# Altium PCB PCB1.PcbDoc (part 1 of 2)
Units mm, origin at the board's own origin, x right, y up, seen from the top; angles counter-clockwise.
Board outline 62.36 x 41.38 mm, 2 copper layers (Top Layer, Bottom Layer), stack 1.671 mm thick; 52 components, 47 nets, 174 pads, 61 vias.
Unrouted connection lines stored in the file: 1.
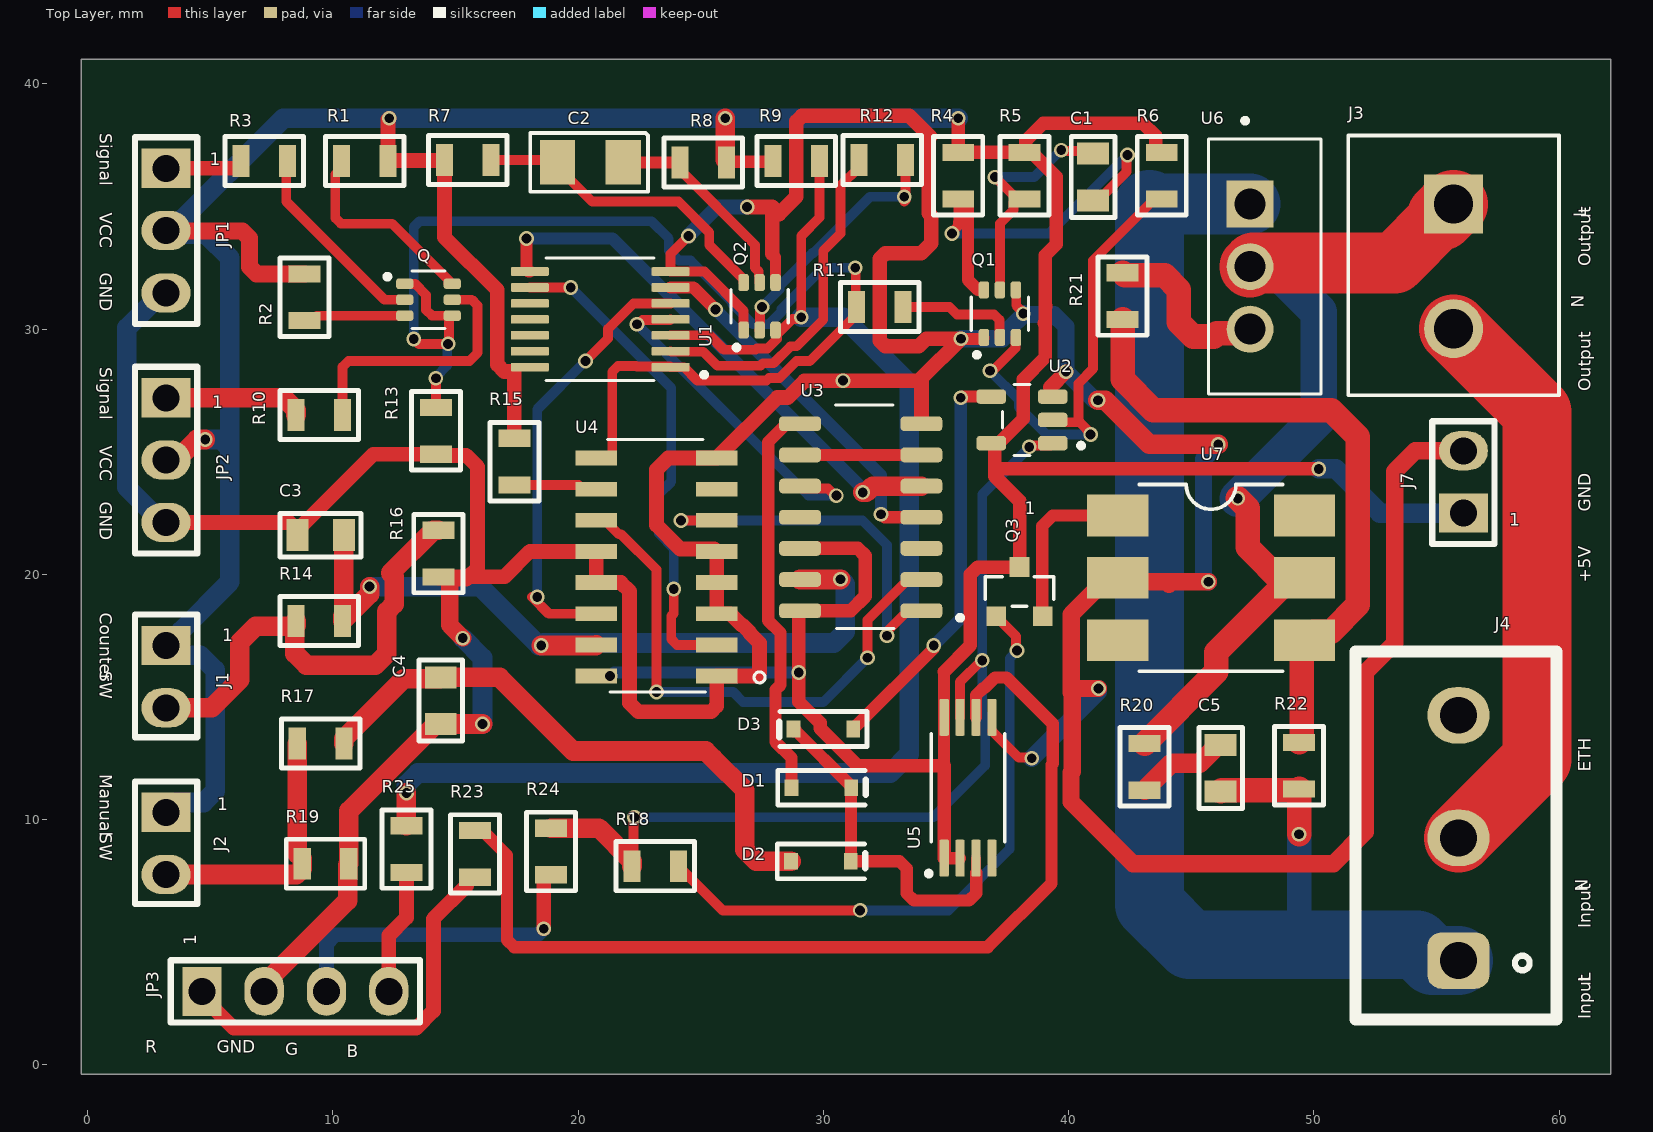
[diagram p0: Top Layer view]
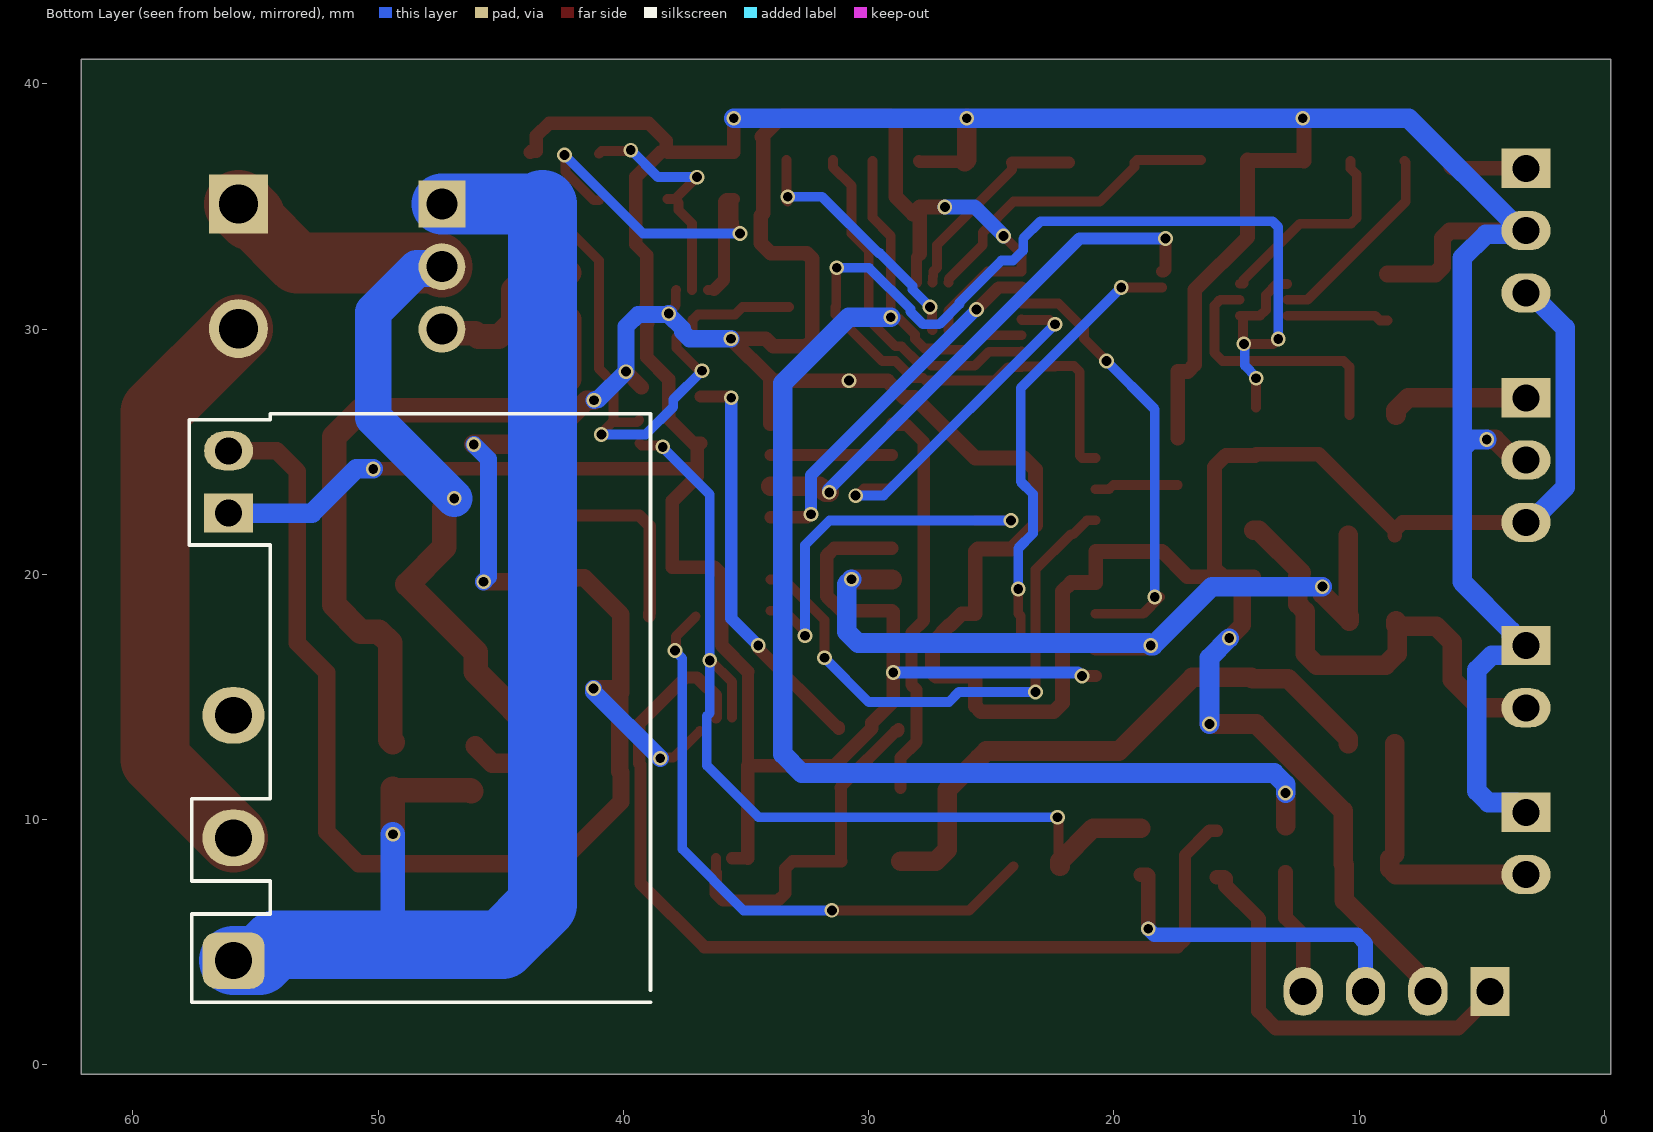
[diagram p1: Bottom Layer view, seen from below]

## Layer stack, top to bottom
Top Solder: solder mask 0.0102, Solder Resist, Dk 3.5
Top Layer: signal copper 0.0356
Dielectric 1: dielectric 1.6, FR-4, Dk 4.8
Bottom Layer: signal copper 0.0356
Bottom Solder: solder mask 0.0102, Solder Resist, Dk 3.5

## Board outline
-0.254,-0.381 62.103,-0.381 62.103,41 -0.254,41

## Design rules (kind name [scope] priority, off if disabled: settings)
Clearance [All] p1: gap=0.2 ignorepadtopadclearanceinfootprint=FALSE
ComponentClearance [All] p1: gap=0.2 collisioncheckmode=3 verticalgap=0.2 showdistances=FALSE
HoleSize [All] p1: absolutevalues=TRUE maxlimit=10 minlimit=0.2 maxpercent=80.000 minpercent=20.000
HoleToHoleClearance [All] p1: gap=0.3 allowstackedmicrovias=TRUE
MinimumSolderMaskSliver [All] p1: minsoldermaskwidth=0.1
PolygonConnect [All] p1: connectstyle=Relief reliefconductorwidth=0.254 reliefentries=4 polygonreliefangle="90 Angle" airgapwidth=0.254
RoutingVias [All] p1: holewidth=0.4 width=0.6 viastyle="Through Hole" minholewidth=0.4 minwidth=0.6 maxholewidth=0.4 maxwidth=0.8
SilkToSilkClearance [All] p1: silktosilkclearance=0.1
SilkToSolderMaskClearance [IsPad] p1: minsilkscreentomaskgap=0.1 clearancetoexposedcopper=TRUE
SolderMaskExpansion [All] p1: expansion=0.1 istentingtop=FALSE
Width [All] p1: maxlimit=10 minlimit=0.4 preferedwidth=0.5
24 further rules are at their usual default settings.

## Components (designator, comment, footprint, x,y, rotation, side; value= is the part's Value field where it differs from the comment)
C1 "10uF" CAP_0805 41,36.204 r90 top
C2 "100uF 10V" CAP3216 20.5,36.8 r0 top
C3 "100nF" CAP_0805 9.5,21.6 r180 top
C4 "100nF" CAP_0805 14.4,14.85 r270 top
C5 "CAP 100 nF 250V" CAP_0805 46.2,12.1 r90 top
D1 "BAT54HT1G" SOD323 29.919,11.3 r0 top
D2 "BAT54HT1G" SOD323 29.9,8.3 r0 top
D3 "BAT54HT1G" SOD323 30,13.7 r180 top
J1 "75160-327-02LF" "HDR 1x2" 3.2,14.56 r0 top
J2 "75160-327-02LF" "HDR 1x2" 3.2,7.76 r0 top
J3 "TB010-508-02BE" CUI_TB010-508-02BE 55.7,35.1 r270 top
J4 "400 V 13.5 A" "Screw 5mm 3 Terminal" 55.9,4.253 r180 top
J7 "75160-327-02LF" "HDR 1x2" 56.1,25.04 r180 top
JP1 "HDR 1x3" "HDR 1x3" 3.2,34.018 r0 top
JP2 "HDR 1x3" "HDR 1x3" 3.2,24.66 r0 top
JP3 "HDR 1X4" "HDR 1X4" 8.47,3 r90 top
Q "NPN" SOT-363 13.9,31.2 r0 top
Q1 "NPN" SOT-363 37.2,30.63 r90 top
Q2 "NPN" SOT-363 27.4,30.93 r90 top
Q3 "MMBT2484LT1G" SOT23-3 38,19.3 r90 top
R1 "1K" R_0805 11.3,36.855 r0 top
R2 "1K" R_0805 8.849,31.3 r90 top
R3 "560 R" R_0805 7.2,36.855 r0 top
R4 "1K" R_0805 35.5,36.255 r90 top
R5 "1K" R_0805 38.2,36.255 r90 top
R6 "1K" R_0805 43.8,36.255 r90 top
R7 "1K" R_0805 15.5,36.9 r180 top
R8 "100K" R_0805 25.1,36.8 r0 top
R9 "1K" R_0805 28.9,36.855 r180 top
R10 "560 R" R_0805 9.449,26.5 r0 top
R11 "560 R" R_0805 32.3,30.9 r0 top
R12 "560 R" R_0805 32.4,36.9 r0 top
R13 "1K" R_0805 14.2,25.85 r90 top
R14 "560 R" R_0805 9.449,18.1 r0 top
R15 "1K" R_0805 17.4,24.6 r90 top
R16 "1K" R_0805 14.3,20.85 r270 top
R17 "560 R" R_0805 9.5,13.1 r0 top
R18 "560 R" R_0805 23.15,8.1 r0 top
R19 "1K" R_0805 9.7,8.2 r0 top
R20 "560 R" R_0805 43.1,12.15 r90 top
R21 "1K" R_0805 42.2,31.35 r90 top
R22 "10K" R_0805 49.4,12.2 r270 top
R23 "560 R" R_0805 15.8,8.6 r270 top
R24 "560 R" R_0805 18.9,8.7 r270 top
R25 "560 R" R_0805 13,8.8 r270 top
U1 "Inverter" 14-TSSOP 20.9,30.4 r180 top
U2 "SN74AHCT1G08DBV3" SOT-23-5 38.1,26.3 r180 top
U3 "SN74HC21DR" "SOIC 14" 31.636,22.3 r180 top
U4 "CD4516BNSR" "SOIC 16" 23.2,20.3 r180 top
U5 "MC10EP35DTR2G" 8-TSSOP 35.9,11.3 r90 top
U6 "BTA16-600BRG" BAT16 47.5,35.1 r270 top
U7 "4N26XSM" "SMD 6" 45.81,19.86 r0 top

## Footprints (in the part's own frame and the unit in brackets; to place one, negate y for a bottom-side part, rotate by r counter-clockwise, add the part's x,y. Pads: shape width x height; smd on the part's side, far side on the other; paste and mask are expansions set on the pad)
8-TSSOP [mm]
  rrect25% 1.5x0.38 smd mask+0.06: 1(-2.87,0.975) 2(-2.87,0.325) 3(-2.87,-0.325) 4(-2.87,-0.975) 5(2.87,-0.975) 6(2.87,-0.325) 7(2.87,0.325) 8(2.87,0.975)
  silkscreen extent -3.6,-1.5 2.2,1.7, body extent -3.2,-1.5 3.2,1.5, height 1.21
14-TSSOP [mm]
  rrect25% 1.55x0.35 smd mask+0.06: 1(-2.87,1.95) 2(-2.87,1.3) 3(-2.87,0.65) 4(-2.87,0) 5(-2.87,-0.65) 6(-2.87,-1.3) 7(-2.87,-1.95) 8(2.87,-1.95) 9(2.87,-1.3) 10(2.87,-0.65) 11(2.87,0) 12(2.87,0.65) 13(2.87,1.3) 14(2.87,1.95)
  silkscreen extent -4.34,-2.5 2.2,2.5, body extent -3.2,-2.55 3.2,2.55, height 1.2
BAT16 [mm]
  rect 1.91x1.91 hole 1.27: 1(0,-0.1)
  round 1.91 hole 1.27: 2(2.55,-0.1) 3(5.1,-0.1)
  silkscreen extent -3.5,-1.8 7.75,2.8, body extent -2.43,-1.86 7.53,2.59, height 15.76
CAP3216 [mm]
  rect 1.44x1.82 smd: 1(-1.336,0) 2(1.336,0)
  silkscreen extent -2.45,-1.2 2.35,1.2, body extent -1.6,-0.8 1.6,0.8, height 1.9
CAP_0805 [mm]
  rect 0.9x1.3 smd: 1(-0.95,0) 2(0.95,0)
  silkscreen extent -1.65,-0.89 1.65,0.89, body extent -1,-0.6 1,0.6, height 1.4
CUI_TB010-508-02BE [mm]
  rect 2.4x2.4 hole 1.6: 1(0,0)
  round 2.4 hole 1.6: 2(5.08,0)
  silkscreen extent -2.8,-4.3 7.8,4.3, body extent -2.6,-4 7.55,4, height 10.01
"HDR 1x2" [mm]
  rect 2x1.6 hole 1.1: 1(0,2.54)
  oval 2x1.6 hole 1.1: 2(0,0)
  silkscreen extent -1.27,-1.2 1.27,3.8, body extent -1.27,-1.23 1.27,3.85, height 8.15
"HDR 1x3" [mm]
  rect 2x1.6 hole 1.1: 1(0,2.54)
  oval 2x1.6 hole 1.1: 2(0,0) 3(0,-2.54)
  silkscreen extent -1.27,-3.81 1.27,3.81, body extent -1.14,-3.61 1.27,3.61, height 8.39
"HDR 1X4" [mm]
  rect 2x1.6 hole 1.1: 1(0,3.81)
  oval 2x1.6 hole 1.1: 2(0,1.27) 3(0,-1.27) 4(0,-3.81)
  silkscreen extent -1.27,-5.08 1.27,5.08, body extent -1.27,-4.88 1.14,4.88, height 8.39
R_0805 [mm]
  rect 0.7x1.3 smd: 1(-0.95,0) 2(0.95,0)
  silkscreen extent -1.6,-1 1.6,1, body extent -1,-0.6 1,0.6, height 0.71
"Screw 5mm 3 Terminal" [mm]
  rrect50% 2.54x2.3 hole 1.5: 1(0,0)
  oval 2.54x2.3 hole 1.5: 2(0,-5) 3(0,-10)
  silkscreen extent -4,-12.6 4.2,2.4, body extent -4,-12.5 4,2.65, height 10.01
"SMD 6" [mm]
  rect 2.5x1.7 smd: 1(-3.81,2.54) 2(-3.81,0) 3(-3.81,-2.54) 4(3.81,-2.54) 5(3.81,0) 6(3.81,2.54)
  silkscreen extent -2.92,-3.81 2.92,3.81, body extent -4.8,-3.65 5,3.6, height 3.72
SOD323 [mil]
  rect 22x27 smd: 1(48,0) 2(-48,0)
  silkscreen extent -70,-28 71,28, body extent -49,-21 49,28, height 36
"SOIC 14" [mm]
  rrect50% 1.7x0.6 smd: 1(-2.364,3.78) 2(-2.364,2.51) 3(-2.364,1.24) 4(-2.364,-0.03) 5(-2.364,-1.3) 6(-2.364,-2.57) 7(-2.364,-3.84) 8(2.586,-3.84) 9(2.586,-2.57) 10(2.586,-1.3) 11(2.586,-0.03) 12(2.586,1.24) 13(2.586,2.51) 14(2.586,3.78)
  silkscreen extent -4.04,-4.6 1.14,4.5, body extent -3,-4.4 3,4.4, height 1.7
"SOIC 16" [mm]
  rect 1.7x0.6 smd: 1(-2.455,4.445) 2(-2.455,3.175) 3(-2.455,1.905) 4(-2.455,0.635) 5(-2.455,-0.635) 6(-2.455,-1.905) 7(-2.455,-3.175) 8(-2.455,-4.445) 9(2.455,-4.445) 10(2.455,-3.175) 11(2.455,-1.905) 12(2.455,-0.635) 13(2.455,0.635) 14(2.455,1.905) 15(2.455,3.175) 16(2.455,4.445)
  silkscreen extent -4.42,-5.2 2,5.1, body extent -3.18,-4.95 2.89,4.95, height 1.41
SOT23-3 [mm]
  rect 0.8x0.8 smd: 1(-1.01,0.95) 2(-1.01,-0.95) 3(1,0)
  silkscreen extent -0.6,-1.4 0.6,1.4, body extent -1.2,-1.46 1.2,1.46, height 0.99
SOT-23-5 [mm]
  rrect50% 1.21x0.59 smd: 1(-1.255,0.95) 2(-1.255,0) 3(-1.255,-0.95) 4(1.255,-0.95) 5(1.255,0.95)
  silkscreen extent -2.51,-1.45 0.8,1.45, body extent -1.4,-1.45 1.4,1.45, height 1.45
SOT-363 [mm]
  rrect50% 0.7x0.43 smd mask+0.05: 1(-0.97,0.65) 2(-0.97,0) 3(-0.97,-0.65) 4(0.97,-0.65) 5(0.97,0) 6(0.97,0.65)
  silkscreen extent -1.78,-1.17 0.68,1.17, body extent -1.12,-1.08 1.18,1.02, height 1

## Part data
C1: library part CAP_10uF_0805, "CERAMIC CAPACITOR, 10UF, 16V, X5R, 20%, 0805, FULL REEL; Product Range:C Series; Capacitance:10 F; Capacitance Tolerance: 20%; Dielectric Characteristic:X5R; Voltage Rating:16V; Ceramic Capacitor Case:0805 [2012 Metric]; MSL:- ;RoHS Compliant: Yes", Case Code (Imperial)=0805, Case Code (Metric)=2012, Dielectric=X5R, Dielectric Material=Ceramic, Manufacturer=TDK, Manufacturer Part Number=C2012X5R1C106M125AC, Max Operating Temperature=85°C, Min Operating Temperature=-55°C, Package Quantity=1, Supplier Part Number 1=445-4115-1-ND, Tolerance=20%, Voltage Rating=16V, Capacitance=10uF, Case/Package=0805, Category="Ceramic Capacitors", ComponentLink1Description=https://datasheet.ciiva.com/6289/tdkmlcccaprange-6289238.pdf?src-supplier=Digi-Key, ComponentLink1URL=https://datasheet.ciiva.com/6289/tdkmlcccaprange-6289238.pdf?src-supplier=Digi-Key, ComponentLink2Description=https://datasheet.ciiva.com/22725/1913358-22725558.pdf?src-supplier=Element14, ComponentLink2URL=https://datasheet.ciiva.com/22725/1913358-22725558.pdf?src-supplier=Element14, ComponentLink3Description=https://datasheet.ciiva.com/6252/tdkmlcccaprange-6252105.pdf?src-supplier=Digi-Key, ComponentLink3URL=https://datasheet.ciiva.com/6252/tdkmlcccaprange-6252105.pdf?src-supplier=Digi-Key, ComponentLink4Description=https://datasheet.ciiva.com/6252/tdkmlcccaprange-6252108.pdf?src-supplier=Digi-Key, ComponentLink4URL=https://datasheet.ciiva.com/6252/tdkmlcccaprange-6252108.pdf?src-supplier=Digi-Key, ComponentLink5Description=https://datasheet.ciiva.com/23803/1796654-23803022.pdf?src-supplier=Newark, ComponentLink5URL=https://datasheet.ciiva.com/23803/1796654-23803022.pdf?src-supplier=Newark, Depth=1.25mm, Height=1.25mm, Lead Free="Lead Free", Length=0.079inch, Mount="Surface Mount", Number of Pins=2, Packaging="Tape and Reel", REACH SVHC="No SVHC", Resistor Type=Ceramic, RoHS=Yes, RoHS Compliant=Yes, Series=C, Supplier 1=Digi-Key, Termination=SMD/SMT, Thickness=0.057inch, Voltage Rating (DC)=16V, Weight=0.000194oz, Width=0.049inch
C2: library part "CAP 100 uF SMD Non Polar", "C Series 1206 100 uF 10 V ±20 % Tolerance JB SMT Multilayer Ceramic Capacitor", Capacitance=100uF, Case Code (Imperial)=1206, Case Code (Metric)=3216, Dielectric Material=Ceramic, Manufacturer=TDK, Manufacturer Part Number=C3216JB1A107M160AC, Max Operating Temperature=85°C, Min Operating Temperature=-25°C, Package Quantity=2000, Tolerance=20%, Voltage Rating=10V, Case/Package=1206, Category="Ceramic Capacitors", ComponentLink1Description=https://datasheet.ciiva.com/14887/tdkmlcccaprange-14887077.pdf?src-supplier=Digi-Key, ComponentLink1URL=https://datasheet.ciiva.com/14887/tdkmlcccaprange-14887077.pdf?src-supplier=Digi-Key, ComponentLink2Description=https://datasheet.ciiva.com/14887/tdkmlcccaprange-14887078.pdf?src-supplier=Digi-Key, ComponentLink2URL=https://datasheet.ciiva.com/14887/tdkmlcccaprange-14887078.pdf?src-supplier=Digi-Key, ComponentLink3Description=https://datasheet.ciiva.com/14887/tdkmlcccaprange-14887079.pdf?src-supplier=Digi-Key, ComponentLink3URL=https://datasheet.ciiva.com/14887/tdkmlcccaprange-14887079.pdf?src-supplier=Digi-Key, Height=1.6mm, Lead Free="Lead Free", Length=0.126inch, Mount="Surface Mount", Packaging="Tape and Reel", Pricing 1="1=1.26370, 10=0.99660, 25=0.98660, 50=0.92240, 100=0.76590 (USD)", Resistor Type=Ceramic, RoHS=Yes, RoHS Compliant=Yes, Series=C, Stock 1=129, Supplier 1="Arrow Electronics", Supplier Part Number 1=C3216JB1A107M160AC, Termination=SMD/SMT, Thickness=0.069inch, Voltage Rating (DC)=10V, Width=0.063inch
C3 C4: library part CAP_100nF_0805, "C Series 0805 0.1 uF 50 V ±10 % Tolerance X7R SMT Multilayer Ceramic Capacitor", Case Code (Imperial)=0805, Case Code (Metric)=2012, Dielectric=X7R, Dielectric Material=Ceramic, Manufacturer=TDK, Manufacturer Part Number=C2012X7R1H104K085AA, Max Operating Temperature=125°C, Min Operating Temperature=-55°C, Package Quantity=1, Supplier Part Number 1=87R4037, Tolerance=10%, Voltage=50V, Capacitance=100nF, Case/Package=0805, Category="Ceramic Capacitors", ComponentLink1Description=https://datasheet.ciiva.com/11788/0900766b80c1bb00-11788128.pdf?src-supplier=RSComponents, ComponentLink1URL=https://datasheet.ciiva.com/11788/0900766b80c1bb00-11788128.pdf?src-supplier=RSComponents, ComponentLink2Description=https://datasheet.ciiva.com/6250/tdkmlcccaprange-6250821.pdf?src-supplier=Digi-Key, ComponentLink2URL=https://datasheet.ciiva.com/6250/tdkmlcccaprange-6250821.pdf?src-supplier=Digi-Key, ComponentLink3Description=https://datasheet.ciiva.com/24191/e412-c-24191447.pdf?src-supplier=Future+Electronics, ComponentLink3URL=https://datasheet.ciiva.com/24191/e412-c-24191447.pdf?src-supplier=Future+Electronics, ComponentLink4Description=https://datasheet.ciiva.com/6250/tdkmlcccaprange-6250824.pdf?src-supplier=Digi-Key, ComponentLink4URL=https://datasheet.ciiva.com/6250/tdkmlcccaprange-6250824.pdf?src-supplier=Digi-Key, ComponentLink5Description=https://datasheet.ciiva.com/23803/1796654-23803035.pdf?src-supplier=Newark, ComponentLink5URL=https://datasheet.ciiva.com/23803/1796654-23803035.pdf?src-supplier=Newark, ComponentLink6Description=https://datasheet.ciiva.com/28602/1571323-28602204.pdf?src-supplier=Element14, ComponentLink6URL=https://datasheet.ciiva.com/28602/1571323-28602204.pdf?src-supplier=Element14, Construction=Flat, Depth=1.25mm, Height=0.85mm, Lead Free="Lead Free", Length=2mm, Mount="Surface Mount", Number of Pins=2, Packaging="Tape and Reel", Pricing 1="4000=0.02500, 8000=0.02400 (USD)", Radiation Hardening=No, REACH SVHC="No SVHC", Resistor Type=Ceramic, RoHS=Yes, RoHS Compliant=Yes, Series=C, Stock 1=16000, Supplier 1=Avnet, Termination=SMD/SMT, Thickness=0.037inch, Voltage Rating=50V, Voltage Rating (DC)=50V, Weight=0.000194oz, Width=0.049inch
C5: "C Series 0805 0.1 uF 250 V ±20 % Tolerance X7T SMT Multilayer Ceramic Capacitor"
D1 D2 D3: library part Shottky_Diode, "VR=30V IF=200mA 10pF P=200mW", Average Rectified Current=200mA, Capacitance=10pF, Forward Voltage=800mV, Manufacturer="ON Semiconductor / Fairchild", Max Forward Surge Current (Ifsm)=600mA, Max Operating Temperature=150°C, Max Repetitive Reverse Voltage (Vrrm)=30V, Max Reverse Current=2uA, Min Operating Temperature=-55°C, Package Quantity=3000, Power Dissipation=200mW, Supplier Part Number 1=83H6419, Category="Schottky Diodes", ComponentLink1Description=https://datasheet.ciiva.com/4714/bat54ht1-d-72881-4714706.pdf?src-supplier=Mouser, ComponentLink1URL=https://datasheet.ciiva.com/4714/bat54ht1-d-72881-4714706.pdf?src-supplier=Mouser, ComponentLink2Description=https://datasheet.ciiva.com/4452/bat54ht1g-104602-4452889.pdf?src-supplier=Mouser, ComponentLink2URL=https://datasheet.ciiva.com/4452/bat54ht1g-104602-4452889.pdf?src-supplier=Mouser, ComponentLink3Description=https://datasheet.ciiva.com/30479/0900766b811a63a9-30479442.pdf?src-supplier=RSComponents, ComponentLink3URL=https://datasheet.ciiva.com/30479/0900766b811a63a9-30479442.pdf?src-supplier=RSComponents, ComponentLink4Description=https://datasheet.ciiva.com/34301/806549-34301562.pdf?src-supplier=Jameco, ComponentLink4URL=https://datasheet.ciiva.com/34301/806549-34301562.pdf?src-supplier=Jameco, ComponentLink5Description=https://datasheet.ciiva.com/1240/1747983-1240762.pdf?src-supplier=Newark, ComponentLink5URL=https://datasheet.ciiva.com/1240/1747983-1240762.pdf?src-supplier=Newark, ComponentLink6Description=https://datasheet.ciiva.com/915/bat54ht1-d-915445.pdf?src-supplier=Digi-Key, ComponentLink6URL=https://datasheet.ciiva.com/915/bat54ht1-d-915445.pdf?src-supplier=Digi-Key, ComponentLink7Description=https://datasheet.ciiva.com/915/bat54ht1-d-915444.pdf?src-supplier=Digi-Key, ComponentLink7URL=https://datasheet.ciiva.com/915/bat54ht1-d-915444.pdf?src-supplier=Digi-Key, ComponentLink8Description=https://datasheet.ciiva.com/910/bat54ht1g-910499.pdf?src-supplier=Digi-Key, ComponentLink8URL=https://datasheet.ciiva.com/910/bat54ht1g-910499.pdf?src-supplier=Digi-Key, ComponentLink9Description=https://datasheet.ciiva.com/910/bat54ht1g-910498.pdf?src-supplier=Digi-Key, ComponentLink9URL=https://datasheet.ciiva.com/910/bat54ht1g-910498.pdf?src-supplier=Digi-Key, ComponentLink10Description=https://datasheet.ciiva.com/8294/bat54ht1-d-8294645.pdf?src-supplier=Avnet, ComponentLink10URL=https://datasheet.ciiva.com/8294/bat54ht1-d-8294645.pdf?src-supplier=Avnet, ComponentLink11Description=https://datasheet.ciiva.com/910/bat54ht1g-910497.pdf?src-supplier=Digi-Key, ComponentLink11URL=https://datasheet.ciiva.com/910/bat54ht1g-910497.pdf?src-supplier=Digi-Key, ComponentLink12Description=https://datasheet.ciiva.com/8303/bat54ht1g-8303645.pdf?src-supplier=Avnet, ComponentLink12URL=https://datasheet.ciiva.com/8303/bat54ht1g-8303645.pdf?src-supplier=Avnet, ComponentLink13Description=https://datasheet.ciiva.com/915/bat54ht1-d-915443.pdf?src-supplier=Digi-Key, ComponentLink13URL=https://datasheet.ciiva.com/915/bat54ht1-d-915443.pdf?src-supplier=Digi-Key, ComponentLink14Description=https://datasheet.ciiva.com/46429/1727620-46429206.pdf?src-supplier=Element14, ComponentLink14URL=https://datasheet.ciiva.com/46429/1727620-46429206.pdf?src-supplier=Element14, ComponentLink15Description=https://datasheet.ciiva.com/1180/bat54ht1-d-1180252.pdf?src-supplier=Element14, ComponentLink15URL=https://datasheet.ciiva.com/1180/bat54ht1-d-1180252.pdf?src-supplier=Element14, ComponentLink16Description=https://datasheet.ciiva.com/1180/bat54ht1-d-1180251.pdf?src-supplier=Element14, ComponentLink16URL=https://datasheet.ciiva.com/1180/bat54ht1-d-1180251.pdf?src-supplier=Element14, ComponentLink17Description=https://datasheet.ciiva.com/17020/bat54ht1g-17020445.pdf?src-supplier=Future+Electronics, ComponentLink17URL=https://datasheet.ciiva.com/17020/bat54ht1g-17020445.pdf?src-supplier=Future+Electronics, ComponentLink18Description=https://datasheet.ciiva.com/48686/001262925-da-01-en-diode-schottky-30v-bat54ht1g-sod-323-fsc-48686266.pdf?src-supplier=Conrad, ComponentLink18URL=https://datasheet.ciiva.com/48686/001262925-da-01-en-diode-schottky-30v-bat54ht1g-sod-323-fsc-48686266.pdf?src-supplier=Conrad, Contact Plating=Tin,Matte, Current Rating=200mA, Element Configuration=Single, Forward Current=200mA, Height=1mm, Lead Free="Lead Free", Length=1.8mm, Manufacturer Part Number=BAT54HT1G, Max Reverse Leakage Current=2uA, Max Reverse Voltage (DC)=30V, Max Surge Current=600mA, Mount="Surface Mount", Number of Pins=2, Output Current=200mA, Packaging="Tape and Reel", Peak Non-Repetitive Surge Current=600mA, Polarity=Standard, Pricing 1="1=0.32000, 10=0.22600, 100=0.12200, 500=0.09600 (USD)", Radiation Hardening=No, REACH SVHC="No SVHC", Recovery Time=5ns, Reverse Recovery Time=5ns, Reverse Voltage=30V, RoHS=Yes, RoHS Compliant=Yes, Stock 1=15000, Supplier 1=Newark, Voltage Rating (DC)=30V, Width=1.35mm
J1 J2 J7: library part MALE_HDR_1X2, "Conn Unshrouded Header HDR 2 POS 2.54mm Solder ST Thru-Hole Poly Bag", Manufacturer="Amphenol ICC / FCI", Category=Connectors, ComponentLink1Description=https://datasheet.ciiva.com/10145/75160-10145737.pdf?src-supplier=Avnet, ComponentLink1URL=https://datasheet.ciiva.com/10145/75160-10145737.pdf?src-supplier=Avnet, ComponentLink2Description=https://datasheet.ciiva.com/13670/75160-99052-13670687.pdf?src-supplier=Mouser, ComponentLink2URL=https://datasheet.ciiva.com/13670/75160-99052-13670687.pdf?src-supplier=Mouser, Manufacturer Part Number=75160-327-02LF, Pricing 1="100=0.09225, 200=0.08985, 400=0.08745, 600=0.08506, 800=0.08266, 1000=0.08027, 10000=0.07787 (USD)", RoHS=Yes, Supplier 1=Avnet, Supplier Part Number 1=75160-327-02LF
J3: library part "Screw terminal 2 pin", "2~24 Poles, Screw Type, Horizontal, 5.08 Pitch, 26~12 (AWG), Terminal Block Connector", Manufacturer="CUI Devices", Category="Terminal Blocks", Manufacturer Part Number=TB010-508-02BE, Pricing 1="1=0.80810, 10=0.41960, 25=0.41540, 50=0.41120, 100=0.35430, 250=0.35070, 500=0.32260 (USD)", RoHS=Yes, Stock 1=2322, Supplier 1="Arrow Electronics", Supplier Part Number 1=TB010-508-02BE
J4: library part "Screw Terminal HV 3 pins", "Phoenix Contact 5441540, BC-500X10- 3 BK PCB terminal blo", Color=Black, Current=10A, Manufacturer="Phoenix Contact", Manufacturer Part Number=5441540, Supplier Part Number 1=651-5441540, Voltage=300V, Category="Terminal Blocks", ComponentLink1Description=https://media.digikey.com/pdf/Data%20Sheets/Phoenix%20Contact%20PDFs/5441540.pdf?src-supplier=Digi-Key, ComponentLink1URL=https://media.digikey.com/pdf/Data%20Sheets/Phoenix%20Contact%20PDFs/5441540.pdf?src-supplier=Digi-Key, Housing Material=Nylon, Mount="Through Hole", Number of Levels=1, Number of Positions Per Level=3, Packaging=Bulk, Pitch=0.197inch, Pricing 1="1=1.75000, 10=1.68000, 50=1.63000, 100=1.52000, 1000=1.24000, 10000=1.16000 (USD)", RoHS=Yes, Stock 1=78, Supplier 1=Mouser, Termination=Screw, Wire Gauge (Max)=30AWG, Wire Gauge (Min)=14AWG
JP1 JP2: library part Male_HDR_1X3_Unschrouded, "Conn Unshrouded Header HDR 3 POS 2.54mm Solder ST Top Entry Thru-Hole BergStik® Bulk", Manufacturer="Amphenol ICC / FCI", Manufacturer Part Number=68797-403HLF, Supplier Part Number 1=649-68797-403HLF, Category="Headers and Wire Housings", ComponentLink1Description=http://components.arrow.com/part/dataview/42734829S8484744N8314?src-supplier=Arrow+Electronics, ComponentLink1URL=http://components.arrow.com/part/dataview/42734829S8484744N8314?src-supplier=Arrow+Electronics, ComponentLink2Description=http://www.mouser.com/ds/2/154/68000-274373.pdf?src-supplier=Mouser, ComponentLink2URL=http://www.mouser.com/ds/2/154/68000-274373.pdf?src-supplier=Mouser, ComponentLink3Description=http://portal.fciconnect.com/Comergent/fci/drawing/68000.pdf?src-supplier=Avnet, ComponentLink3URL=http://portal.fciconnect.com/Comergent/fci/drawing/68000.pdf?src-supplier=Avnet, Pricing 1="1=0.26000, 10=0.18500, 50=0.18500, 100=0.14600, 1000=0.11800, 2000=0.10500, 10000=0.09500, 25000=0.08900, 50000=0.08500, 100000=0.08200 (USD)", RoHS=Yes, Stock 1=8712, Supplier 1=Mouser
JP3: library part MALE_HDR_4X1_Unschrouded, "Conn Unshrouded Header HDR 4 POS 2.54mm Solder ST Thru-Hole Bag", Manufacturer="Amphenol ICC", Manufacturer Part Number=68001-204HLF, Supplier Part Number 1=70302499, Category="Headers and Wire Housings", ComponentLink1Description=http://www.farnell.com/cad/2615197.pdf?src-supplier=Farnell, ComponentLink1URL=http://www.farnell.com/cad/2615197.pdf?src-supplier=Farnell, ComponentLink2Description=http://www.farnell.com/cad/2615197.pdf?src-supplier=Newark, ComponentLink2URL=http://www.farnell.com/cad/2615197.pdf?src-supplier=Newark, RoHS=Yes, Supplier 1="Allied Electronics"
Q Q1 Q2: library part "NPN SMD 2 CKT", "三极管 2NPN Vceo=40V Ic=200mA Pd=225mW", Manufacturer="Pan Jit", Manufacturer Part Number=MMDT3904_R1_00001, Supplier Part Number 1=3757-MMDT3904_R1_00001CT-ND, Pricing 1="1=0.23000, 10=0.18500, 100=0.09790, 500=0.06440, 1000=0.04379 (USD)", RoHS=No, Stock 1=42118, Supplier 1=Digi-Key
Q3: library part "BJT SMD", "Transistor Bipolar (BJT) NPN 60V 100mA 225mW Surface Mount SOT-23-3", Case/Package=SOT-23-3, Collector Base Voltage (VCBO)=60V, Collector Emitter Saturation Voltage=350mV, Current Rating=100mA, Emitter Base Voltage (VEBO)=6V, Manufacturer="ON Semiconductor", Max Frequency=1MHz, Max Operating Temperature=150°C, Max Power Dissipation=225mW, Min Operating Temperature=-55°C, Package Quantity=1, Power Dissipation=300mW, Supplier Part Number 1=7916126P, Category=BJTs, Collector Emitter Breakdown Voltage=60V, Collector Emitter Voltage (VCEO)=60V, Collector-emitter Voltage-Max=350mV, ComponentLink1Description=https://datasheet.ciiva.com/976/mmbt2484lt1-d-976544.pdf?src-supplier=Digi-Key, ComponentLink1URL=https://datasheet.ciiva.com/976/mmbt2484lt1-d-976544.pdf?src-supplier=Digi-Key, ComponentLink2Description=https://datasheet.ciiva.com/4721/mmbt2484lt1-d-95150-4721744.pdf?src-supplier=Mouser, ComponentLink2URL=https://datasheet.ciiva.com/4721/mmbt2484lt1-d-95150-4721744.pdf?src-supplier=Mouser, ComponentLink3Description=https://datasheet.ciiva.com/11201/mmbt2484lt1-d-11201761.pdf?src-supplier=Avnet, ComponentLink3URL=https://datasheet.ciiva.com/11201/mmbt2484lt1-d-11201761.pdf?src-supplier=Avnet, ComponentLink4Description=https://datasheet.ciiva.com/30480/0900766b8127ca68-30480445.pdf?src-supplier=RSComponents, ComponentLink4URL=https://datasheet.ciiva.com/30480/0900766b8127ca68-30480445.pdf?src-supplier=RSComponents, ComponentLink5Description=https://datasheet.ciiva.com/15138/getdatasheetpartid-38721-15138638.pdf?src-supplier=Verical, ComponentLink5URL=https://datasheet.ciiva.com/15138/getdatasheetpartid-38721-15138638.pdf?src-supplier=Verical, ComponentLink6Description=https://datasheet.ciiva.com/976/mmbt2484lt1-d-976545.pdf?src-supplier=Digi-Key, ComponentLink6URL=https://datasheet.ciiva.com/976/mmbt2484lt1-d-976545.pdf?src-supplier=Digi-Key, ComponentLink7Description=https://datasheet.ciiva.com/976/mmbt2484lt1-d-976546.pdf?src-supplier=Digi-Key, ComponentLink7URL=https://datasheet.ciiva.com/976/mmbt2484lt1-d-976546.pdf?src-supplier=Digi-Key, ComponentLink8Description=https://datasheet.ciiva.com/7972/mmbt2484lt1-d-7972373.pdf?src-supplier=Element14, ComponentLink8URL=https://datasheet.ciiva.com/7972/mmbt2484lt1-d-7972373.pdf?src-supplier=Element14, Contact Plating=Tin,Matte, Element Configuration=Single, Height=1.01mm, hFE Min=250, Lead Free="Lead Free", Length=3.04mm, Manufacturer Part Number=MMBT2484LT1G, Max Breakdown Voltage=60V, Max Collector Current=100mA, Number of Elements=1, Number of Pins=3, Packaging="Tape and Reel", Polarity=NPN, Pricing 1="100=0.12200, 200=0.10100, 500=0.08000, 1000=0.05500 (USD)", Radiation Hardening=No, REACH SVHC="No SVHC", RoHS=Yes, RoHS Compliant=Yes, Series=-, Stock 1=1, Supplier 1=RSComponents, Voltage Rating (DC)=60V, Width=1.4mm
R1 R2 R4 R5 R6 R7 R9 R13 R15 R16 R19 R21: library part RES_1_K_0805, "贴片电阻 1000Ω ± 1.00% 0.125W ± 100ppm/℃ 0805", Case Code (Imperial)=0805, Case Code (Metric)=2012, Manufacturer=Yageo, Manufacturer Part Number=RC0805FR-071KL, Max Operating Temperature=155°C, Max Power Dissipation=125mW, Min Operating Temperature=-55°C, Package Quantity=1, Resistance=1kR, Resistance Tolerance=1%, Resistor Type="Thick Film", Supplier Part Number 1=8126013, Temperature Coefficient=100ppm/°C, Voltage Rating=150V, Case/Package=0805, Category="Chip SMD Resistors", ComponentLink1Description=https://datasheet.ciiva.com/7941/1686128-7941719.pdf?src-supplier=Element14, ComponentLink1URL=https://datasheet.ciiva.com/7941/1686128-7941719.pdf?src-supplier=Element14, ComponentLink2Description=https://datasheet.ciiva.com/46385/444164-46385020.pdf?src-supplier=Element14, ComponentLink2URL=https://datasheet.ciiva.com/46385/444164-46385020.pdf?src-supplier=Element14, ComponentLink3Description=https://datasheet.ciiva.com/2456/pyu-r-int-thick-7-2456976.pdf?src-supplier=Digi-Key, ComponentLink3URL=https://datasheet.ciiva.com/2456/pyu-r-int-thick-7-2456976.pdf?src-supplier=Digi-Key, ComponentLink4Description=https://datasheet.ciiva.com/2456/pyu-r-int-thick-7-2456977.pdf?src-supplier=Digi-Key, ComponentLink4URL=https://datasheet.ciiva.com/2456/pyu-r-int-thick-7-2456977.pdf?src-supplier=Digi-Key, ComponentLink5Description=https://datasheet.ciiva.com/2456/pyu-r-int-thick-7-2456975.pdf?src-supplier=Digi-Key, ComponentLink5URL=https://datasheet.ciiva.com/2456/pyu-r-int-thick-7-2456975.pdf?src-supplier=Digi-Key, ComponentLink6Description=https://datasheet.ciiva.com/16850/rc0805-16850409.pdf?src-supplier=Future+Electronics, ComponentLink6URL=https://datasheet.ciiva.com/16850/rc0805-16850409.pdf?src-supplier=Future+Electronics, Construction=Rectangular, Depth=1.25mm, Features="Moisture Resistant", Height=0.024inch, Lead Free="Lead Free", Length=0.079inch, Military Standard=Not, Number of Pins=2, Number of Terminations=2, Packaging="Tape and Reel", Power Rating=125mW, Pricing 1="5000=0.00390 (USD)", REACH SVHC=Unknown, RoHS=Yes, RoHS Compliant=Yes, Series=RC, Size Code=0805, Stock 1=10195000, Supplier 1="Future Electronics", Termination=SMD/SMT, Tolerance=1%, Voltage Rating (DC)=150V, Width=0.049inch
R3 R10 R11 R12 R14 R17 R18 R20 R23 R24 R25: library part RES_560_Ohm_0805, "贴片电阻 560Ω ± 1.00% 0.125W ± 100ppm/℃ 0805", Case Code (Imperial)=0805, Case Code (Metric)=2012, Manufacturer=Yageo, Manufacturer Part Number=RC0805FR-07560RL, Max Operating Temperature=155°C, Max Power Dissipation=125mW, Min Operating Temperature=-55°C, Package Quantity=1, Resistance=560R, Resistance Tolerance=1%, Resistor Type="Thick Film", Temperature Coefficient=100ppm/°C, Voltage Rating=150V, Case/Package=0805, Category="Chip SMD Resistors", Construction=Rectangular, Depth=1.25mm, Features="Moisture Resistant", Height=0.024inch, Lead Free="Lead Free", Length=2mm, Military Standard=Not, Number of Terminations=2, Packaging="Tape and Reel", Power Rating=125mW, Pricing 1="5000=0.00227, 10000=0.00224, 20000=0.00217 (USD)", REACH SVHC=Unknown, RoHS=Yes, RoHS Compliant=Yes, Series=RC, Size Code=0805, Stock 1=5000, Supplier 1=Avnet, Supplier Part Number 1=RC0805FR-07560RL, Termination=SMD/SMT, Tolerance=1%, Weight=0.000194oz, Width=0.049inch
R8: library part RES_100_K_0805, "贴片电阻 100000Ω ± 1.00% 0.125W ± 100ppm/℃ 0805", Case Code (Imperial)=0805, Case Code (Metric)=2012, Manufacturer=Yageo, Manufacturer Part Number=RC0805FR-07100KL, Max Operating Temperature=155°C, Max Power Dissipation=125mW, Min Operating Temperature=-55°C, Package Quantity=1, Resistance=100kR, Resistance Tolerance=1%, Resistor Type="Thick Film", Temperature Coefficient=100ppm/°C, Voltage Rating=150V, Case/Package=0805, Category="Chip SMD Resistors", ComponentLink1Description=https://datasheet.ciiva.com/11808/0900766b8106beab-11808858.pdf?src-supplier=RSComponents, ComponentLink1URL=https://datasheet.ciiva.com/11808/0900766b8106beab-11808858.pdf?src-supplier=RSComponents, ComponentLink2Description=https://datasheet.ciiva.com/7941/1686128-7941677.pdf?src-supplier=Element14, ComponentLink2URL=https://datasheet.ciiva.com/7941/1686128-7941677.pdf?src-supplier=Element14, ComponentLink3Description=https://datasheet.ciiva.com/7660/38627-7660796.pdf?src-supplier=Element14, ComponentLink3URL=https://datasheet.ciiva.com/7660/38627-7660796.pdf?src-supplier=Element14, ComponentLink4Description=https://datasheet.ciiva.com/22747/444164-22747534.pdf?src-supplier=Element14, ComponentLink4URL=https://datasheet.ciiva.com/22747/444164-22747534.pdf?src-supplier=Element14, ComponentLink5Description=https://datasheet.ciiva.com/2457/pyu-r-int-thick-7-2457018.pdf?src-supplier=Digi-Key, ComponentLink5URL=https://datasheet.ciiva.com/2457/pyu-r-int-thick-7-2457018.pdf?src-supplier=Digi-Key, ComponentLink6Description=https://datasheet.ciiva.com/2457/pyu-r-int-thick-7-2457019.pdf?src-supplier=Digi-Key, ComponentLink6URL=https://datasheet.ciiva.com/2457/pyu-r-int-thick-7-2457019.pdf?src-supplier=Digi-Key, ComponentLink7Description=https://datasheet.ciiva.com/2457/pyu-r-int-thick-7-2457017.pdf?src-supplier=Digi-Key, ComponentLink7URL=https://datasheet.ciiva.com/2457/pyu-r-int-thick-7-2457017.pdf?src-supplier=Digi-Key, ComponentLink8Description=https://datasheet.ciiva.com/12667/rc0805-12667001.pdf?src-supplier=Mouser, ComponentLink8URL=https://datasheet.ciiva.com/12667/rc0805-12667001.pdf?src-supplier=Mouser, ComponentLink9Description=https://datasheet.ciiva.com/7941/1697719-7941676.pdf?src-supplier=Element14, ComponentLink9URL=https://datasheet.ciiva.com/7941/1697719-7941676.pdf?src-supplier=Element14, ComponentLink10Description=https://datasheet.ciiva.com/7941/1697719-7941678.pdf?src-supplier=Element14, ComponentLink10URL=https://datasheet.ciiva.com/7941/1697719-7941678.pdf?src-supplier=Element14, ComponentLink11Description=https://datasheet.ciiva.com/16747/rc0805-16747226.pdf?src-supplier=Future+Electronics, ComponentLink11URL=https://datasheet.ciiva.com/16747/rc0805-16747226.pdf?src-supplier=Future+Electronics, Construction=Rectangular, Depth=1.25mm, Features="Moisture Resistant", Height=0.024inch, Lead Free="Lead Free", Lead Pitch=0.4mm, Length=2mm, Military Standard=Not, Number of Pins=2, Number of Terminations=2, Packaging="Tape and Reel", Power Rating=125mW, Pricing 1="5000=0.00227, 10000=0.00224, 20000=0.00217 (USD)", REACH SVHC=Unknown, RoHS=Yes, RoHS Compliant=Yes, Series=RC, Size Code=0805, Stock 1=345000, Supplier 1=Avnet, Supplier Part Number 1=RC0805FR-07100KL, Technology="THICK FILM", Termination=SMD/SMT, Tolerance=1%, Voltage Rating (DC)=150V, Width=0.049inch
R22: library part RES_10_K_0805, "贴片电阻 10000Ω ± 1.00% 0.125W ± 100ppm/℃ 0805", Case Code (Imperial)=0805, Case Code (Metric)=2012, Manufacturer=Yageo, Manufacturer Part Number=RC0805FR-0710KL, Max Operating Temperature=155°C, Max Power Dissipation=125mW, Min Operating Temperature=-55°C, Package Quantity=1, Resistance=10kR, Resistance Tolerance=1%, Resistor Type="Thick Film", Temperature Coefficient=100ppm/°C, Voltage Rating=150V, Case/Package=0805, Category="Chip SMD Resistors", Construction=Rectangular, Depth=1.25mm, Features="Moisture Resistant", Height=0.024inch, Lead Free="Lead Free", Length=2mm, Military Standard=Not, Number of Terminations=2, Packaging="Tape and Reel", Power Rating=125mW, Pricing 1="5000=0.00227, 10000=0.00224, 20000=0.00217 (USD)", REACH SVHC=Unknown, RoHS=Yes, RoHS Compliant=Yes, Series=RC, Size Code=0805, Stock 1=725000, Supplier 1=Avnet, Supplier Part Number 1=RC0805FR-0710KL, Technology="THICK FILM", Termination=SMD/SMT, Tolerance=1%, Width=0.049inch
U1: library part "NOT GATE 7 Channel", "6-ch, 4.5-V to 5.5-V inverters with Schmitt-Trigger inputs 14-TSSOP -40 to 85", Case/Package=TSSOP, High Level Output Current=-24mA, Low Level Output Current=24mA, Manufacturer="Texas Instruments", Manufacturer Part Number=SN74ACT14PWR, Max Operating Temperature=85°C, Max Supply Voltage=5.5V, Min Operating Temperature=-40°C, Min Supply Voltage=4.5V, Package Quantity=2000, Quiescent Current=2uA, Supplier Part Number 1=296-4369-1-ND, Category="Logic Gates", ComponentLink1Description=https://datasheet.ciiva.com/15089/getdatasheetpartid-305342-15089581.pdf?src-supplier=Verical, ComponentLink1URL=https://datasheet.ciiva.com/15089/getdatasheetpartid-305342-15089581.pdf?src-supplier=Verical, ComponentLink2Description=https://datasheet.ciiva.com/41456/001016133-da-01-en-ic-hex-schm-tr-sn74act14pwr-tssop-14-tid-41456409.pdf?src-supplier=Conrad, ComponentLink2URL=https://datasheet.ciiva.com/41456/001016133-da-01-en-ic-hex-schm-tr-sn74act14pwr-tssop-14-tid-41456409.pdf?src-supplier=Conrad, ComponentLink3Description=https://datasheet.ciiva.com/1864/sn74act14-1864429.pdf?src-supplier=Digi-Key, ComponentLink3URL=https://datasheet.ciiva.com/1864/sn74act14-1864429.pdf?src-supplier=Digi-Key, ComponentLink4Description=https://datasheet.ciiva.com/1864/sn74act14-1864428.pdf?src-supplier=Digi-Key, ComponentLink4URL=https://datasheet.ciiva.com/1864/sn74act14-1864428.pdf?src-supplier=Digi-Key, ComponentLink5Description=https://datasheet.ciiva.com/1864/sn74act14-1864430.pdf?src-supplier=Digi-Key, ComponentLink5URL=https://datasheet.ciiva.com/1864/sn74act14-1864430.pdf?src-supplier=Digi-Key, ComponentLink6Description=https://datasheet.ciiva.com/14289/sn74act14-14289596.pdf?src-supplier=Avnet, ComponentLink6URL=https://datasheet.ciiva.com/14289/sn74act14-14289596.pdf?src-supplier=Avnet, Contact Plating=Gold, Lead Free="Lead Free", Logic Function="Buffer,Inverter,Schmitt Trigger", Mount="Surface Mount", Number of Bits=6, Number of Circuits=6, Number of Elements=6, Number of Gates=6, Number of Inputs=1, Number of Pins=14, Operating Supply Voltage=5.5V, Output Current=24mA, Packaging="Tape and Reel", Pricing 1="1=0.63000, 10=0.55300, 25=0.51920, 100=0.42370, 250=0.39356, 500=0.33496, 1000=0.26797 (USD)", Propagation Delay=12.5ns, Radiation Hardening=No, REACH SVHC="No SVHC", RoHS=Yes, RoHS Compliant=Yes, Stock 1=3394, Supplier 1=Digi-Key, Turn-On Delay Time=12.5ns, Weight=0.002018oz
U2: library part "AND 2 INP 1 CKT", "Single 2-input, 4.5-V to 5.5-V AND gate with TTL-compatible CMOS inputs 5-SOT-23 -40 to 125", Manufacturer="Texas Instruments", Supplier Part Number 1=296-SN74AHCT1G08DBV3CT-ND, Category="Logic Gates", ComponentLink1Description=http://www.ti.com/general/docs/suppproductinfo.tsp?distId=10&amp;gotoUrl=http%3A%2F%2Fwww.ti.com%2Flit%2Fgpn%2FSN74AHCT1G08&src-supplier=Digi-Key, ComponentLink1URL=http://www.ti.com/general/docs/suppproductinfo.tsp?distId=10&amp;gotoUrl=http%3A%2F%2Fwww.ti.com%2Flit%2Fgpn%2FSN74AHCT1G08&src-supplier=Digi-Key, Logic Function="AND GATE", Manufacturer Part Number=SN74AHCT1G08DBV3, Pricing 1="1=0.46000, 10=0.37400, 25=0.34200, 100=0.25440, 250=0.23056, 500=0.19080, 1000=0.14310 (USD)", RoHS=Yes, RoHS Compliant=Yes, Stock 1=12309, Supplier 1=Digi-Key
U3: library part "AND 4 inp 2 ch SMD", "AND Gate IC 2 Channel  14-SOIC", Case/Package=SOIC, High Level Output Current=-5.2mA, Low Level Output Current=5.2mA, Manufacturer="Texas Instruments", Max Operating Temperature=85°C, Max Supply Voltage=6V, Min Operating Temperature=-40°C, Min Supply Voltage=2V, Operating Supply Voltage=5V, Output Current=25mA, Package Quantity=1, Quiescent Current=2uA, Category="Logic Gates", ComponentLink1Description=https://datasheet.ciiva.com/1865/sn74hc21-1865190.pdf?src-supplier=Digi-Key, ComponentLink1URL=https://datasheet.ciiva.com/1865/sn74hc21-1865190.pdf?src-supplier=Digi-Key, ComponentLink2Description=https://datasheet.ciiva.com/1865/sn74hc21-1865189.pdf?src-supplier=Digi-Key, ComponentLink2URL=https://datasheet.ciiva.com/1865/sn74hc21-1865189.pdf?src-supplier=Digi-Key, ComponentLink3Description=https://datasheet.ciiva.com/1865/sn74hc21-1865191.pdf?src-supplier=Digi-Key, ComponentLink3URL=https://datasheet.ciiva.com/1865/sn74hc21-1865191.pdf?src-supplier=Digi-Key, ComponentLink4Description=https://datasheet.ciiva.com/14291/sn54hc21-14291336.pdf?src-supplier=Avnet, ComponentLink4URL=https://datasheet.ciiva.com/14291/sn54hc21-14291336.pdf?src-supplier=Avnet, ComponentLink5Description=https://datasheet.ciiva.com/48702/001073280-da-01-en-ic-dual-4in-pos-a-sn74hc21dr-soic-14-tid-48702981.pdf?src-supplier=Conrad, ComponentLink5URL=https://datasheet.ciiva.com/48702/001073280-da-01-en-ic-dual-4in-pos-a-sn74hc21dr-soic-14-tid-48702981.pdf?src-supplier=Conrad, Contact Plating=Gold, Lead Free="Lead Free", Logic Function="AND GATE", Manufacturer Part Number=SN74HC21DR, Mount="Surface Mount", Number of Bits=2, Number of Circuits=2, Number of Elements=2, Number of Gates=2, Number of Input Lines=4, Number of Inputs=4, Number of Output Lines=1, Number of Outputs=1, Number of Pins=14, Packaging="Tape and Reel", Pricing 1="1=0.52890, 10=0.42710, 25=0.39120, 100=0.29110, 250=0.26380, 500=0.21830, 1000=0.16380, 2500=0.15020 (USD)", Propagation Delay=24ns, Radiation Hardening=No, REACH SVHC="No SVHC", RoHS=Yes, RoHS Compliant=Yes, Stock 1=216, Supplier 1="Arrow Electronics", Supplier Part Number 1=SN74HC21DR, Turn-On Delay Time=28ns, Weight=0.004564oz
U4: library part "COUNTER CD4516BNSR", "CMOS Presettable Binary Up/Down Counter 16-SO -55 to 125", Case/Package=SOP, Frequency=11MHz, Manufacturer="Texas Instruments", Max Operating Temperature=125°C, Max Supply Voltage=18V, Min Operating Temperature=-55°C, Min Supply Voltage=3V, Package Quantity=2000, Quiescent Current=100uA, Supplier Part Number 1=296-29362-1-ND, Category=Counters, Clock Edge Trigger Type="Positive Edge", ComponentLink1Description=https://datasheet.ciiva.com/15093/getdatasheetpartid-321652-15093806.pdf?src-supplier=Verical, ComponentLink1URL=https://datasheet.ciiva.com/15093/getdatasheetpartid-321652-15093806.pdf?src-supplier=Verical, ComponentLink2Description=https://datasheet.ciiva.com/1848/cd4516b-1848472.pdf?src-supplier=Digi-Key, ComponentLink2URL=https://datasheet.ciiva.com/1848/cd4516b-1848472.pdf?src-supplier=Digi-Key, ComponentLink3Description=https://datasheet.ciiva.com/1848/cd4510b-1848471.pdf?src-supplier=Digi-Key, ComponentLink3URL=https://datasheet.ciiva.com/1848/cd4510b-1848471.pdf?src-supplier=Digi-Key, ComponentLink4Description=https://datasheet.ciiva.com/1848/cd4516b-1848473.pdf?src-supplier=Digi-Key, ComponentLink4URL=https://datasheet.ciiva.com/1848/cd4516b-1848473.pdf?src-supplier=Digi-Key, ComponentLink5Description=https://datasheet.ciiva.com/14295/cd4516b-14295800.pdf?src-supplier=Avnet, ComponentLink5URL=https://datasheet.ciiva.com/14295/cd4516b-14295800.pdf?src-supplier=Avnet, Contact Plating=Gold, Direction=Bidirectional, Lead Free="Lead Free", Logic Function=Counter, Manufacturer Part Number=CD4516BNSR, Mount="Surface Mount", Number of Bits=4, Number of Bits per Element=4, Number of Elements=1, Number of Pins=16, Packaging="Tape and Reel", Pricing 1="1=0.59000, 10=0.50500, 25=0.47120, 100=0.37690, 250=0.35000, 500=0.29616, 1000=0.22885 (USD)", Propagation Delay=640ns, Radiation Hardening=No, Reset=Asynchronous, RoHS=Yes, RoHS Compliant=Yes, Series=4000B, Stock 1=10527, Supplier 1=Digi-Key, Sync/Async=Synchronous, Technology=CMOS, Turn-On Delay Time=640ns, Weight=0.007079oz
U5: library part "JK Flipflop", "Flip Flop JK-Type Pos-Edge 1-Element 8-Pin TSSOP T/R", Case/Package=TSSOP, Frequency=3GHz, High Level Output Current=-50mA, Low Level Output Current=50mA, Manufacturer="ON Semiconductor", Max Operating Temperature=85°C, Max Supply Voltage=5.5V, Min Operating Temperature=-40°C, Min Supply Voltage=3V, Package Quantity=2500, Supplier Part Number 1=863-MC10EP35DTR2G, Category="Latches and Flip Flops", Clock Edge Trigger Type="Positive Edge", ComponentLink1Description=https://datasheet.ciiva.com/1860/mc10ep35-d-1860067.pdf?src-supplier=Digi-Key, ComponentLink1URL=https://datasheet.ciiva.com/1860/mc10ep35-d-1860067.pdf?src-supplier=Digi-Key, ComponentLink2Description=https://datasheet.ciiva.com/8280/mc10ep35-d-8280233.pdf?src-supplier=Avnet, ComponentLink2URL=https://datasheet.ciiva.com/8280/mc10ep35-d-8280233.pdf?src-supplier=Avnet, Halogen Free="Halogen Free", Input Type=SINGLE-ENDED, Lead Free="Lead Free", Logic Function=Flip-Flop,JK-Type, Manufacturer Part Number=MC10EP35DTR2G, Mount="Surface Mount", Number of Bits=1, Number of Bits per Element=1, Number of Circuits=1, Number of Elements=1, Number of Input Lines=1, Number of Output Lines=1, Number of Pins=8, Packaging="Tape and Reel", Polarity=Non-Inverting, Propagation Delay=0.49ns, RoHS=Yes, RoHS Compliant=Yes, Series=10EP, Supplier 1=Mouser, Technology=ECL, Turn-On Delay Time=410ps
U6: library part Triac, "TRIAC Standard 600V 16A Through Hole TO-220AB"
U7: "DC-IN 1-CH Transistor With Base DC-OUT 6-Pin PDIP SMD", Case/Package=SMD/SMT, Collector-emitter Voltage-Max=500mV, Forward Voltage=1.2V, Input Current=10mA, Isolation Voltage=5.3kV, Manufacturer=Isocom, Max Operating Temperature=100°C, Max Output Voltage=30V, Min Operating Temperature=-55°C, Output Current per Channel=50mA, Supplier Part Number 1=1712953, Category=Optocouplers, ComponentLink1Description=https://datasheet.ciiva.com/1249/90919-1249842.pdf?src-supplier=Farnell, ComponentLink1URL=https://datasheet.ciiva.com/1249/90919-1249842.pdf?src-supplier=Farnell, ComponentLink2Description=https://datasheet.ciiva.com/1246/90919-1246996.pdf?src-supplier=Element14, ComponentLink2URL=https://datasheet.ciiva.com/1246/90919-1246996.pdf?src-supplier=Element14, Input Type=DC, Manufacturer Part Number=4N26XSM, Mount="Surface Mount", Number of Channels=1, Number of Pins=6, Output Voltage=30V, Packaging=Rail/Tube, REACH SVHC="No SVHC", RoHS=Yes, RoHS Compliant=Yes, Series=-, Supplier 1=RSComponents

## Via types
v1: diameter 0.6, hole 0.4, Top Layer to Bottom Layer, 61 vias

## Nets (pads, with @x,y where several pads share a name; then routed paths per layer and width w, separated by ;. In a path a pad name is that pad's centre, name@x,y a point inside that pad or via, vN(x,y) a via of type N, cw(c..) or ccw(c..) an arc to the next point about the centre after c; other vN are vias at no path point)
+5: J1.1 J2.1 J7.1 JP1.2 JP2.2 Q3.3 R1.2 R2.2 R4.2 R5.2 R6.2 R7.2 R8.2 R9.2 R15.2 U1.14 U2.5 U3.12 U3.14 U4.16 U5.1 U5.2 U5.8 | length 186.2
  Top Layer w0.5: U4.16 v1(21.3,15.855) ; R8.2 26.077,36.827 27.922,36.827 R9.2 ; U5.1 U5.2 ; 34.925,12.2 U5.8 34.925,16.034
  Top Layer w0.55: U3.12 31.407,21.06 31.7,20.767 31.7,19.1 31.12,18.52 U3.14 29,18.47 29,14.81 29.866,13.944 29.866,13.723 31.39,12.2 34.925,12.2 U5.1 ; 34.925,16.034 36,17.109 36,20.007 36.293,20.3 Q3.3 38,22.993 37,23.993 U2.5@37,25.305 ; v1(35.5,38.6) R4.2 R5.2 38.25,37.255 38.25,37.681 38.969,38.4 43.031,38.4 43.55,37.881 43.55,37.255 43.75,37.255 R6.2 ; U2.5 37.155,25.35 38.15,26.345 38.15,27.95 39.05,28.85 39.05,30.289 ; 37,24.3 v1(50.2,24.3) ; R5.2@38.5,37.205 39.5,36.205 39.5,33.468 39.05,33.018 39.05,30.289 ; 39,30.239 39.05,30.289 ; 39.062,30.911 39.062,30.961
  Top Layer w0.6: v1(12.3,38.6) 12.25,38.55 R1.2 12.273,36.877 14.527,36.877 R7.2 14.55,33.75 16.7,31.6 16.7,28.563 16.993,28.27 17.4,28.27 R15.2
  Top Layer w0.7: JP1.2 3.218,34 6.307,34 6.6,33.707 6.6,32.543 6.893,32.25 R2.2
  Top Layer w0.8: JP2.2 3.616,24.66 4.456,25.5 v1(4.8,25.5) ; v1(26,38.6) 26,36.905 R8.2@26.077,36.827
  Bottom Layer w0.5: v1(21.3,15.855) 21.327,15.855 21.472,16 v1(29,16)
  Bottom Layer w0.8: J2.1 3.6,10.7 4.731,10.7 5.2,11.169 5.2,16.1 4.6,16.7 3.6,16.7 J1.1 3.4,17.1 3.8,17.5 3.8,17.7 5.8,19.7 5.8,25.141 ; v1(4.8,25.5) 5.441,25.5 5.8,25.141 ; v1(35.5,38.6) v1(26,38.6) v1(12.3,38.6) 7.982,38.6 3.4,34.018 JP1.2 3.353,33.865 4.835,33.865 5.8,32.9 5.8,25.5 5.8,25.141 ; v1(50.2,24.3) 50.9,24.3 52.7,22.5 J7.1
CO_1: U3.1 U4.6 | length 15.9
  Top Layer w0.4: v1(24.2,22.2) 24.203,22.203 25.652,22.203 U4.6 ; v1(32.6,17.5) 32.638,17.538 32.638,17.708 33.45,18.52 U3.1
  Bottom Layer w0.4: v1(24.2,22.2) 31.6,22.2 32.6,21.2 v1(32.6,17.5)
CO_2: U3.2 U4.11 | length 22.2
  Top Layer w0.4: U4.11 21.095,22.205 21.665,21.635 21.761,21.635 23.2,20.196 v1(23.2,15.2) ; v1(31.8,16.6) 31.8,18.14 33.45,19.79 U3.2
  Bottom Layer w0.4: v1(23.2,15.2) 26.327,15.2 26.727,14.8 30,14.8 v1(31.8,16.6)
CO_3: U1.5 U4.14 | length 18.2
  Top Layer w0.4: v1(18.335,19.077) 18.123,19.077 18.805,18.395 U4.14 ; v1(20.3,28.7) 21.224,29.624 21.224,30.014 22.26,31.05 U1.5
  Bottom Layer w0.4: v1(18.335,19.077) 18.335,26.735 v1(20.3,28.7)
"CO_3 inverted": U1.6 U3.4 | length 15
  Top Layer w0.5: U1.6 24.7,31.7 v1(25.6,30.8) ; v1(32.355,22.45) 32.382,22.45 32.502,22.33 U3.4
  Bottom Layer w0.5: v1(25.6,30.8) 32.355,24.045 v1(32.355,22.45)
CO_4: U1.9 U4.2 | length 20.2
  Top Layer w0.4: U1.9 v1(19.7,31.7) ; v1(23.9,19.4) 23.9,18.403 23.8,18.303 23.8,17.359 24.034,17.125 U4.2
  Bottom Layer w0.4: v1(19.7,31.7) 23.8,27.6 23.8,23.777 23.3,23.277 23.3,21.666 23.9,21.066 v1(23.9,19.4)
"CO_4 inverted": U1.8 U3.5 | length 22.1
  Top Layer w0.5: v1(17.9,33.7) 17.9,32.425 17.975,32.35 U1.8
  Top Layer w0.8: v1(31.605,23.345) 31.755,23.345 32.01,23.6 U3.5
  Bottom Layer w0.5: v1(17.9,33.7) 21.399,33.7 31.655,23.444 31.655,23.395 v1(31.605,23.345)
"Counter O/P": U3.6 U3.9 | length 4.9
  Top Layer w0.5: U3.9 U3.6
"FF  CLK": D1.1 D2.1 D3.1 U5.3 | length 14.3
  Top Layer w0.4: U5.3@36.225,7.925 U5.3
  Top Layer w0.5: D3.1 28.781,13.636 28.81,13.607 28.895,13.607 31.109,11.393 31.109,11.329 D1.1 31.129,11.29 31.129,8.31 D2.1 33.107,8.3 33.4,8.007 33.4,6.993 33.693,6.7 35.942,6.7 36.235,6.993 U5.3@36.235,7.832
"FF I/P 1": D1.2 U3.8 | length 16.3
  Top Layer w0.5: D1.2 28.7,12.522 28.051,13.171 28.051,15.297 28.25,15.495 28.25,17.621 27.75,18.121 27.75,25.39 28.45,26.09 29,26.09 U3.8
"FF I/P 2": C4.1 D2.2 R17.2 | length 24
  Top Layer w0.8: R17.2 10.45,13.3 12.9,15.75 14.35,15.75 C4.1 16.8,15.8 19.8,12.8 25.2,12.8 25.5,12.5 26.8,11.2 26.8,8.769 27.269,8.3 D2.2
"FF I/P 3": D3.2 U2.4 | length 16.6
  Top Layer w0.5: D3.2 31.219,13.763 31.249,13.793 31.312,13.793 34.481,16.962 34.481,17.081 v1(34.5,17.1) ; v1(35.6,27.2) 35.627,27.2 35.677,27.25 U2.4
  Bottom Layer w0.5: v1(34.5,17.1) 35.6,18.2 v1(35.6,27.2)
GND: C3.2 C4.2 J7.2 JP1.3 JP2.3 JP3.2 Q1.1 Q1.4 Q2.1 Q2.4 R13.1 R16.2 R19.2 U1.7 U2.3 U3.7 U4.1 U4.3 U4.4 U4.5 U4.8 U4.12 U4.13 U5.5 U7.2 | length 215.7
  Top Layer w0.4: v1(24.5,33.8) 23.77,33.07 U1.7 25.15,32.35 26.75,30.75 Q2.1 ; U5.5@36.885,13.62 37.967,12.538 38.462,12.538 v1(38.5,12.5) ; Q1.4 37.865,31.585 37.865,30.973 38.15,30.688 v1(38.15,30.634)
  Top Layer w0.45: 27.917,33.083 28.05,32.95 Q2.4 ; 36.3,29.6 36.54,29.6 36.55,29.61 Q1.1
  Top Layer w0.5: v1(35.616,29.61) 35.627,29.6 36.3,29.6
  Top Layer w0.6: JP2.3 8.23,22.12 C3.2@8.55,21.8 ; C3.2 C3.2@8.55,21.8 ; v1(26.892,34.983) 27.917,34.983 ; 27.917,33.083 27.917,34.983 ; U3.7 34,27.994 ; 39.263,27.637 v1(39.894,28.268) ; C3.2@8.55,21.8 11.65,24.9 R13.1 14.25,24.85 15.431,24.85 15.9,24.381 15.9,20.269 15.531,19.9 ; 15.531,19.9 15.431,19.8 14.769,19.8 14.719,19.85 14.35,19.85 R16.2 15.531,19.9 ; 15.531,19.9 17,19.9 18.035,20.935 U4.12 U4.13 21.749,19.665 22.1,19.314 22.1,14.751 22.451,14.4 25.421,14.4 25.655,14.634 U4.1 27.255,15.855 27.4,16 27.4,17.2 27.005,17.595 27.005,17.632 26.712,17.925 26.675,17.925 26.205,18.395 U4.3 U4.4 U4.5 25.555,21.035 24.165,21.035 23.2,22 23.2,24.276 23.669,24.745 U4.8 28.12,27.21 28.546,27.21 29.236,27.9 v1(30.8,27.9) 33.906,27.9 34,27.994 ; 27.917,34.983 28.2,34.7 28.9,35.4 28.9,38.466 29.134,38.7 33.5,38.7 34.359,37.841 34.3,37.783 34.3,34.727 34.4,34.627 34.4,33.51 33.99,33.1 32.534,33.1 32.3,32.866 32.3,29.534 32.534,29.3 33.893,29.3 34.203,29.61 v1(35.616,29.61) 34,27.994
  Top Layer w0.7: R16.2@14.769,19.8 14.769,17.931 v1(15.3,17.4) ; v1(41.217,15.35) 40.276,15.35 40.11,15.184 ; 44.1,19.6 44,19.7 ; v1(45.7,19.7) 44,19.7 ; J7.2 54.14,25.04 53.3,24.2 53.3,17.2 52.1,16 52.1,9.5 50.8,8.2 42.627,8.2 40.1,10.727 40.1,11.908 40.15,11.958 40.15,15.144 40.11,15.184 ; 40.11,15.184 40.11,18.37 41.6,19.86 U7.2 42.16,19.7 44,19.7
  Top Layer w0.8: JP3.2 7.2,3.3 10.6,6.7 10.6,8.15 R19.2 10.65,10.35 14.2,13.9 C4.2 v1(16.1,13.9) ; v1(41.2,27.1) 41.5,27.1 43.3,25.3 v1(46.1,25.3)